# EAGLE board Hera Puissance 2020 ok (EAGLE 7.1.0)
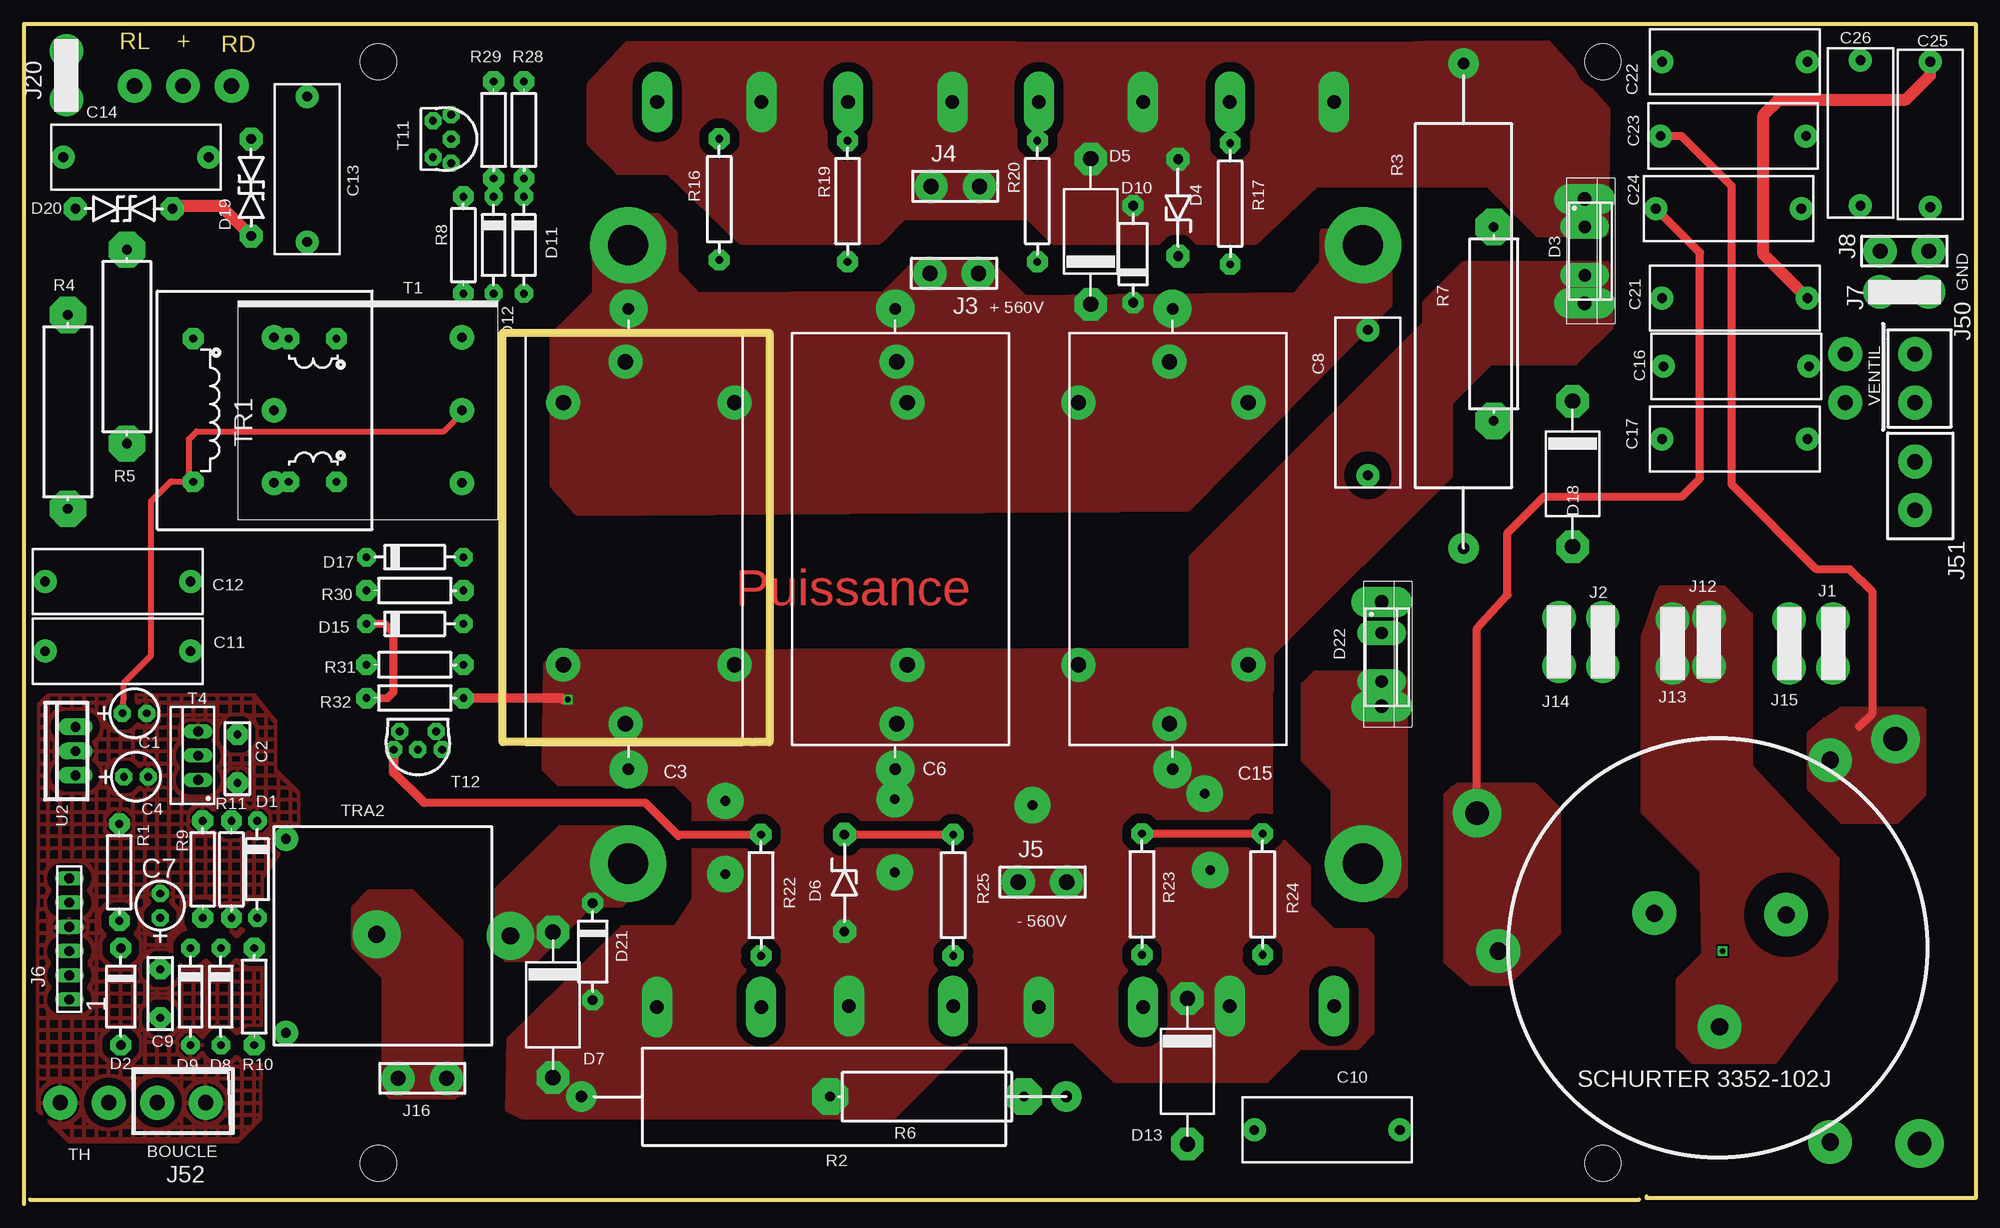
[diagram p0: board, top side]
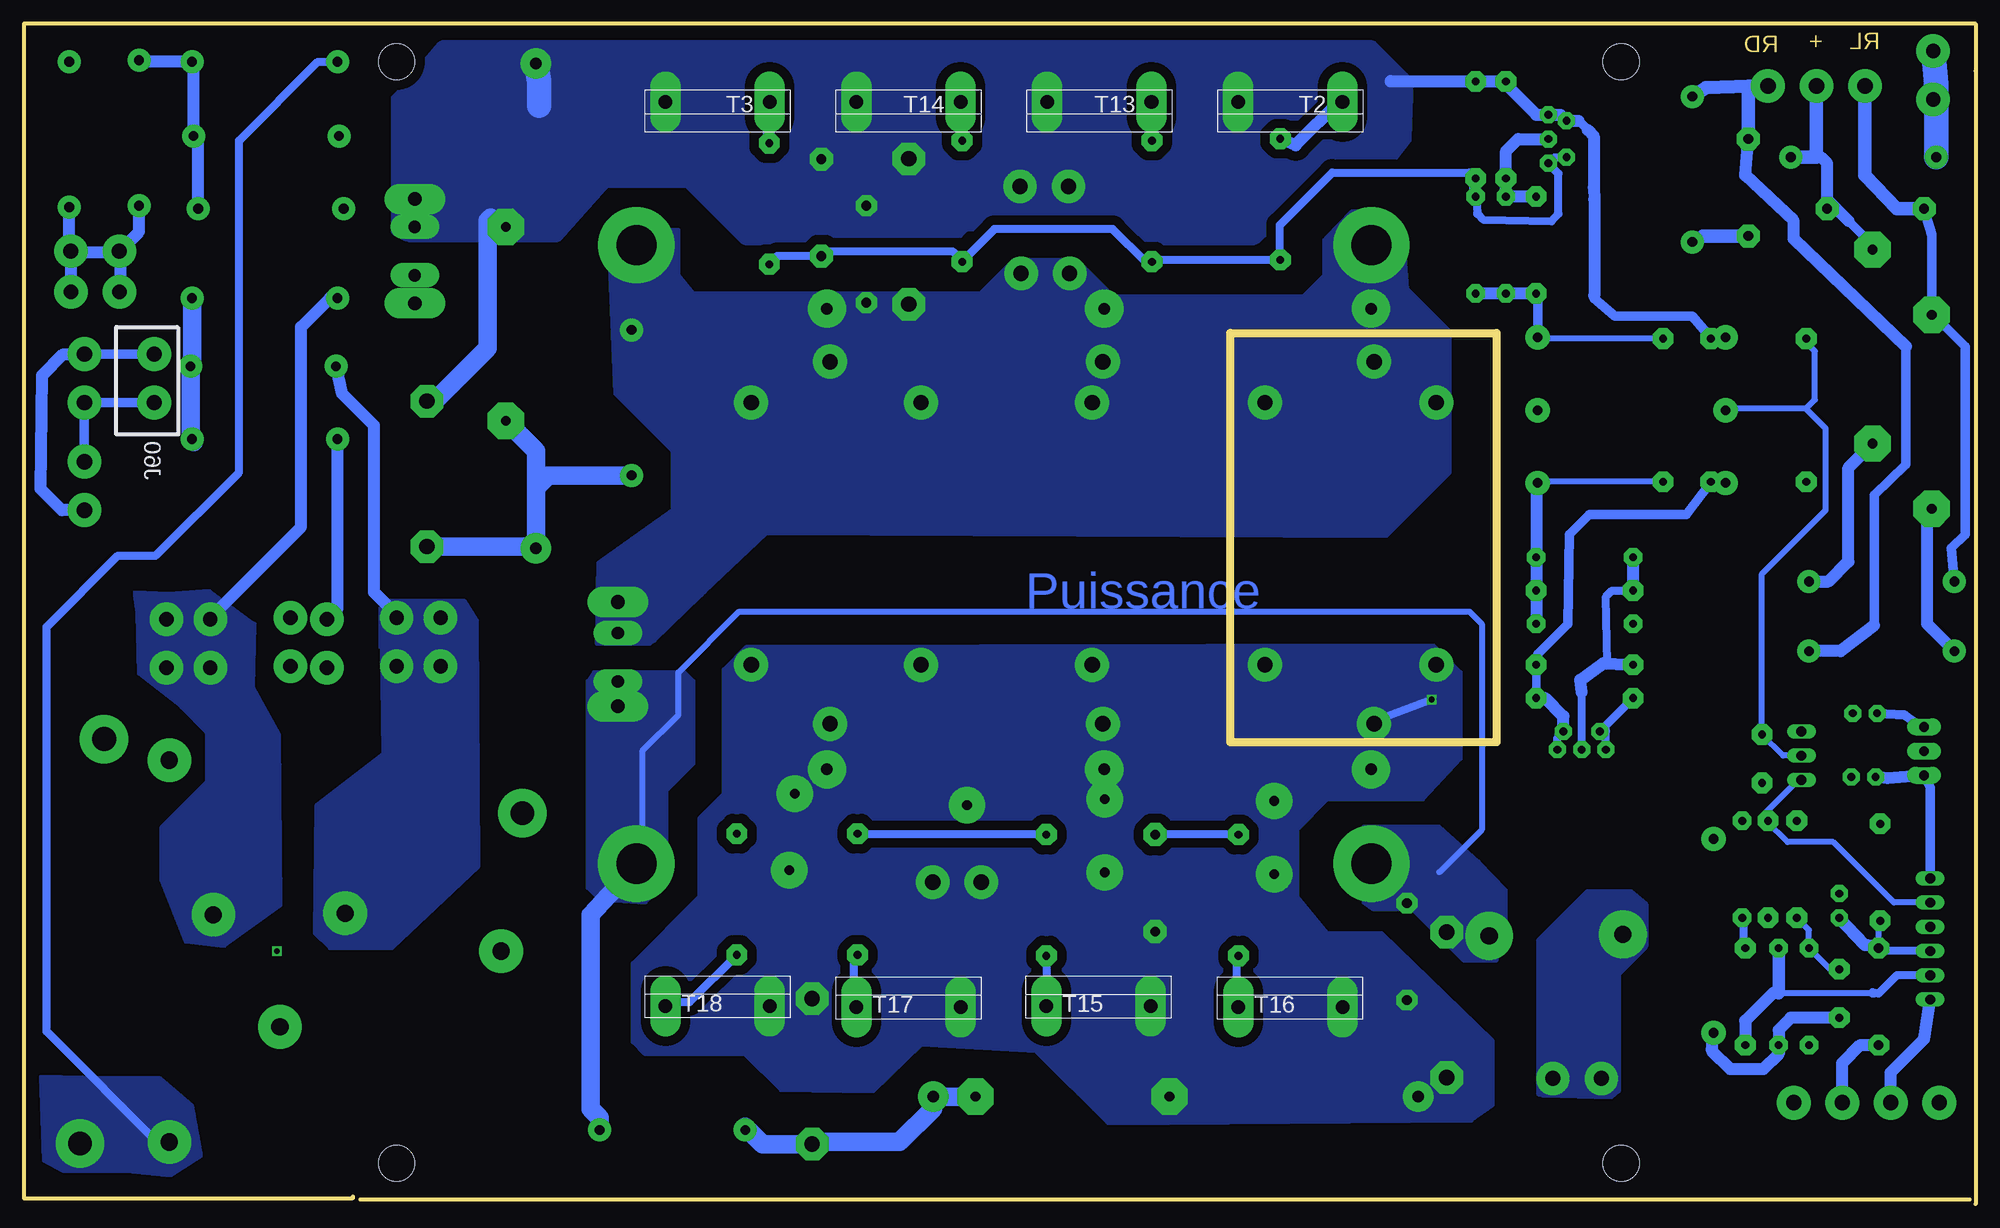
[diagram p1: board, bottom side, seen from below]

Size 204.47 x 123.66 mm. Coordinates in mm from the lower left corner, seen from the top.
Outline: 0,0 0,118.73 0,118.73 0,123.66 204.47,123.66 204.47,0.63 170.02,0.63 170.02,0.79
Outline: 0.63,0.47 169.23,0.47
Copper layers (1*16): Top 0.035mm / dielectric 1.5mm / Bottom 0.035mm
Design rules "default": minimum track width 10mil, minimum drill 24mil, track to track 8mil, track to pad 8mil, pad to pad 8mil, via to via 8mil, smd to smd 8mil, copper to edge 40mil, drill to drill 8mil, minimum pad ring 10mil, minimum via ring 8mil, stop-mask expansion 0mil, vias tented up to drill 0mil, thermal gap 10mil
Holes 3.81 mm at 165.42,119.69 37.15,119.69 37.15,4.28 165.42,4.28
tRestrict: area 180.4,26.1 to 188.8,34.5
Milling: 5 lines

## Footprints (pad centres in the part's own frame; a part is rotated, then mirrored left to right if it is on the bottom)
02P000RA = drill 0.813 pad 1.778 octagon: N 2.54,0; P 0,0
C-5 = drill 0.813 pad 2.159 octagon: 1 5.08,0; 2 0,0
POLY-45 = drill 1.2 pad 4: 1 -24.13,0; 2 24.13,0
C-15 = drill 1.016 pad 2.413: 1 0,0; 2 15.24,0
D-10 = drill 0.813 pad 1.93 octagon: A -5.08,0; K 5.08,0
D-10_1MM = drill 1.016 pad 2.184 octagon: A -5.08,0; K 5.08,0
DOP-3V = drill 1.422 pad 3.175 long: A 5.461,0; K -5.461,0
ZDIO-10 = drill 1.016 pad 2.413 octagon: A -5.08,0; K 5.08,0
D-15 = drill 1.6 pad 3.4 octagon: A -7.62,0; K 7.62,0
TO220DIO = drill 1.27 pad 2.54 long: A 5.08,0; K 0,0
TRANS-10 = drill 1.016 pad 2.413 octagon: A -5.08,0; K 5.08,0
2_TROUS = drill 1.5 pad 3.5: 1 0,0; 2 0,5.08
2_TROUS' = drill 1.6 pad 3.5: 1 0,0; 2 0,5.08
CON06X1 = drill 1.016 pad 1.524 long: 1 0,0; 2 2.54,0; 3 5.08,0; 4 7.62,0; 5 10.16,0; 6 12.7,0
PAST_4,2 = drill 4.2 pad 8: 1 0,0
R-10 = drill 0.813 pad 2.159 octagon: 1 -5.08,0; 2 5.08,0
R-50-5W = drill 1.2 pad 3.2: 1 2.54,0; 2 53.34,0
R-18 = drill 1.016 pad 3.81 octagon: 1 -8.89,0; 2 11.43,0
R-12,5 = drill 0.813 pad 2.184 octagon: 1 -6.35,0; 2 6.35,0
IT_233 = drill 1.016 pad 2.54: P1 -5.08,7.62; P2 14.605,7.62; S1 -5.08,15.24; S2 14.605,15.24; S3 -5.08,0; S4 14.605,0
TOP-3VI = drill 1.422 pad 3.175 long: 1 5.461,0; 3 -5.461,0
TO220V = drill 1.016 pad 1.524 long: 1 0,0; 2 2.54,0; 3 5.08,0
TO92_L = drill 0.813 pad 1.778 octagon: 1 0,0; 2 1.905,1.905; 3 3.81,0; 4 -0.635,1.905; 5 4.445,1.905
TIUTK120 = drill 0.813 pad 2.184 octagon: 1 7.5,7.5; 3 7.5,-7.5; 4 7.5,-2.5; 5 -7.5,-7.5; 6 -7.5,-2.5; 8 -7.5,7.5
TISIRIO1 = drill 1.016 pad 2.54: P1 0,0; P2 20.32,0 | drill 1.8 pad 5: S1 10,9.5; S2 10.16,23.495
TO220V' = drill 1.016 pad 1.778 long: 1 0,0; 2 2.54,0; 3 5.08,0
PAST_1,6 = drill 1.6 pad 3.556: 1 0,0
PAST_1,8 = drill 1.8 pad 4.572: P$1 0,0
PAST_2,5 = drill 2.5 pad 5.08: P$5 0,0

## Placement (x,y rotation side)
C1  22µF  [02P000RA]  10.32,51.43 0 top
C2  1nF  [C-5]  22.38,49.21 270 top
C3  10µF 800V  [POLY-45]  63.34,69.69 270 top
C4  100µF  [02P000RA]  10.48,44.76 0 top
C6  10µF 800V  [POLY-45]  91.28,69.69 270 top
C7  4.7µF  [02P000RA]  14.29,30 90 top
C8  4.7NF1000V  [C-15]  140.81,91.59 270 top
C9  0.1µF  [C-5]  14.29,24.6 270 top
C10  4.7NF1000V  [C-15]  144.14,7.77 180 top
C11  10n-630V  [C-15]  2.22,57.94 0 top
C12  10n-630V  [C-15]  17.46,65.24 180 top
C13  10n-1000v  [C-15]  29.69,100.8 90 top
C14  10nF-1000V  [C-15]  4.13,109.69 0 top
C15  10µF 800V  [POLY-45]  120.33,69.69 270 top
C16  220NF 300V X2  [C-15]  171.77,87.78 0 top
C17  220NF 300V X2  [C-15]  171.61,80.16 0 top
C21  220NF 300V X2  [C-15]  171.61,94.93 0 top
C22  220NF 300V X2  [C-15]  171.61,119.69 0 top
C23  220NF 300V X2  [C-15]  171.45,111.91 0 top
C24  220NF 300V X2  [C-15]  170.97,104.29 0 top
C25  22nF-300V Y2  [C-15]  199.71,104.45 90 top
C26  22nF-300V Y2  [C-15]  192.41,104.61 90 top
D1  1N4148  [D-10]  24.45,35.08 90 top
D2  UF4007  [D-10_1MM]  10.16,21.74 90 top
D3  DSPI 120-12A  [DOP-3V]  163.51,99.85 270 top
D4  18V  [ZDIO-10]  120.92,104.41 270 top
D5  NM  [D-15]  111.76,101.91 270 top
D6  18V  [ZDIO-10]  85.96,33.64 90 top
D7  NM  [D-15]  55.43,20.88 90 top
D8  1N4148  [D-10]  20.64,21.74 90 top
D9  1N4148  [D-10]  17.46,21.74 90 top
D10  NM  [D-10_1MM]  116.21,99.53 270 top
D11  1N4148  [D-10]  52.39,100.48 90 top
D12  1N4148  [D-10]  49.21,100.48 90 top
D13  UF5408  [D-15]  121.89,13.91 90 top
D14  NM  [TO220DIO]  142.24,59.84 270 top
D15  1N4148  [D-10]  40.96,60.8 180 top
D16  NM  [TO220DIO]  163.51,102.39 270 top
D17  1N4148  [D-10]  40.96,67.78 180 top
D18  UF 5408  [D-15]  162.24,76.51 90 top
D19  P6KE300CA  [TRANS-10]  23.81,106.52 270 top
D20  P6KE300CA  [TRANS-10]  10.48,104.29 0 top
D21  NM  [D-10_1MM]  59.59,26.46 90 top
D22  DSPI 120-12A  [DOP-3V]  142.24,57.62 270 top
J1  [2_TROUS]  189.55,56.19 0 top
J2  [2_TROUS]  165.42,56.35 0 top
J3  [2_TROUS']  100,97.53 90 top
J4  [2_TROUS']  95.04,106.64 270 top
J5  [2_TROUS']  104.18,33.74 270 top
J6  CON06-4  [CON06X1]  4.76,21.42 90 top
J7  [2_TROUS]  199.55,95.56 90 top
J8  [2_TROUS']  194.47,99.85 270 top
J12  [2_TROUS]  176.53,56.35 0 top
J13  [2_TROUS]  172.72,56.19 0 top
J14  [2_TROUS]  160.81,56.35 0 top
J15  [2_TROUS]  184.94,56.19 0 top
J16  [2_TROUS']  39.21,13.17 270 top
J20  [2_TROUS]  4.45,115.72 0 top
PAS1  [PAST_4,2]  140.3,100.47 0 top
PAS2  [PAST_4,2]  63.3,100.47 0 top
PAS3  [PAST_4,2]  63.3,35.67 0 top
PAS4  [PAST_4,2]  140.3,35.67 0 top
R1  1K  [R-10]  10,34.76 90 top
R2  NM  [R-50-5W]  55.88,11.27 0 top
R3  NM  [R-50-5W]  150.81,122.07 270 top
R4  22-3w  [R-18]  4.6,81.75 90 top
R5  22-3w  [R-18]  10.79,88.58 90 top
R6  22-3W  [R-18]  93.34,11.27 0 top
R7  22-3W  [R-18]  153.99,93.5 270 top
R8  560  [R-10]  46.04,100.48 270 top
R9  100  [R-10]  18.73,35.08 270 top
R10  10  [R-10]  24.13,21.74 270 top
R11  10K  [R-10]  21.75,35.08 90 top
R16  4.7  [R-12,5]  72.85,105.28 270 top
R17  4.7  [R-12,5]  126.38,104.82 270 top
R19  4.7  [R-12,5]  86.3,105.08 270 top
R20  4.7  [R-12,5]  106.17,105.08 270 top
R22  4.7  [R-12,5]  77.22,32.37 90 top
R23  4.7  [R-12,5]  117.13,32.47 90 top
R24  4.7  [R-12,5]  129.78,32.47 90 top
R25  4.7  [R-12,5]  97.35,32.37 90 top
R28  1k  [R-10]  52.39,112.55 90 top
R29  220  [R-10]  49.21,112.55 90 top
R30  560  [R-10]  40.96,64.29 180 top
R31  220  [R-10]  40.96,56.51 180 top
R32  1k  [R-10]  40.96,53.02 180 top
T1  NM  [IT_233]  31.27,75.56 0 top
T2  3 NGTB 40N120 FL3WG  [TOP-3VI]  71.8,115.47 180 top
T3  [TOP-3VI]  131.8,115.47 180 top
T4  IRF530  [TO220V]  18.26,44.44 90 top
T11  BC327-25  [TO92_L]  42.86,113.5 270 top
T12  BC327-25  [TO92_L]  43.18,49.52 180 top
T13  [TOP-3VI]  91.8,115.47 180 top
T14  [TOP-3VI]  111.8,115.47 180 top
T15  [TOP-3VI]  91.89,20.73 0 top
T16  3 NGTB 40N120 FL3WG  [TOP-3VI]  71.79,20.64 0 top
T17  [TOP-3VI]  111.79,20.65 0 top
T18  [TOP-3VI]  131.79,20.76 0 top
TR1  117120 SIRIO  [TIUTK120]  25.24,83.18 90 top
TRA2  150320 SIRIO  [TISIRIO1]  27.46,38.25 270 top
U2  LM7815  [TO220V']  5.4,44.92 90 top
U$3  [PAST_1,6]  63.02,50.32 0 top
U$4  [PAST_1,6]  91.44,50.32 0 top
U$5  [PAST_1,6]  120.02,50.32 0 top
U$6  [PAST_1,6]  63.02,88.26 0 top
U$7  [PAST_1,6]  91.44,88.26 0 top
U$8  [PAST_1,6]  120.02,88.26 0 top
U$13  [PAST_1,6]  11.59,117.15 0 top
U$16  [PAST_1,6]  16.67,117.15 0 top
U$18  [PAST_1,6]  21.75,117.15 0 top
U$19  [PAST_1,6]  19.05,10.63 0 top
U$20  [PAST_1,6]  8.89,10.63 0 top
U$21  [PAST_1,6]  13.97,10.63 0 top
U$22  [PAST_1,6]  3.81,10.63 0 top
U$23  [PAST_1,6]  190.82,83.97 0 top
U$24  [PAST_1,6]  190.82,89.05 0 top
U$28  [PAST_1,6]  74.45,83.97 90 top
U$29  [PAST_1,6]  92.55,83.97 90 top
U$30  [PAST_1,6]  110.49,83.97 90 top
U$31  [PAST_1,6]  128.27,83.97 90 top
U$32  [PAST_1,6]  92.55,56.51 90 top
U$33  [PAST_1,6]  74.45,56.51 90 top
U$34  [PAST_1,6]  110.49,56.51 90 top
U$35  [PAST_1,6]  128.27,56.51 90 top
U$36  [PAST_1,6]  56.52,83.97 0 top
U$37  [PAST_1,6]  56.52,56.51 0 top
U$38  [PAST_1,6]  198.12,83.97 0 top
U$39  [PAST_1,6]  198.12,89.05 0 top
U$40  [PAST_1,6]  198.12,77.78 0 top
U$41  [PAST_1,6]  198.12,72.7 0 top
U$43  [PAST_1,8]  184.63,30.31 0 top
U$44  [PAST_1,8]  177.64,18.57 0 top
U$45  [PAST_1,8]  189.23,6.5 0 top
U$46  [PAST_1,8]  170.82,30.47 0 top
U$47  [PAST_1,8]  189.23,46.51 0 top
U$48  [PAST_1,8]  154.46,26.5 0 top
U$49  [PAST_2,5]  152.24,40.95 0 top
U$50  [PAST_2,5]  196.06,48.73 0 top
U$51  [PAST_2,5]  198.6,6.34 0 top

## Library data of the parts
C1-C3 C6 C8-C10 C15-C17 C21-C24 D5 D7 D10 D13 D18 D21 R1-R7 = passif
C4 C7 C11-C14 C25 C26 = C
D1 D2 D4 D6 D8 D9 D11 D12 D15 D17 D19 D20 R8-R11 R16 R17 R19 R20 R22-R25 R28-R32 = DISCRETE
D3 D22 = SEMICON
D14 D16 = SEMICON@2
J1 J2 J7 J12-J15 J20 = CONNECT1
J3-J6 J8 J16 = CONNECT
PAS1-PAS4 U$3-U$8 U$13 U$16 U$18-U$24 U$28-U$41 U$43-U$51 = PAST
T1 TR1 = transformateurs
T2 T3 T13-T18 = TRANS
T4 T11 T12 = TRANS1
TRA2 = SPECIAL
U2 = regulate

## Nets
+12V: C1.P T1.P2 TR1.8 U2.3
GND: C1.N C2.1 C4.N C7.N D1.K D9.A J6.4 R1.2 R9.1 R11.1 T4.3 TRA2.P1 U2.2 U$19.1 U$22.1
GNDA: C25.1 C26.1 J7.1 J7.2 J8.1 J8.2
LIMIT: D8.K J6.2 R10.2
N$1: C3.2 C6.2 C15.2 D3.A D6.A D7.A D13.K D16.A D21.A J5.1 J5.2 R2.1 R6.1 R31.1 R32.1 T1.S3 T12.1 T12.4 T15.3 T16.3 T17.3 T18.3 TR1.6 U$3.1 U$4.1 U$5.1 U$32.1 U$33.1 U$34.1 U$35.1 U$37.1
N$2: C4.P J6.6 U2.1
N$3: D1.A R10.1
N$4: D2.A U$21.1
N$5: C7.P D2.K J6.3 R1.1
N$6: J6.1 U$20.1
N$8: C9.2 D9.K R9.2
N$10: C24.1 U$48.P$1 U$49.P$5
N$12: C9.1 D8.A TRA2.P2
N$13: R25.1 T15.1
N$14: C21.1 J1.1 J1.2 J15.1 J15.2 U$43.P$1
N$15: R20.1 T14.1
N$16: C16.2 C17.2 C21.2 C25.2
N$17: C16.1 J2.1 J2.2 J14.1 J14.2 U$46.P$1
N$18: C22.1 U$45.P$1 U$51.P$5
N$19: C22.2 C23.2 C24.2 C26.2
N$20: U$23.1 U$38.1 U$40.1
N$21: C12.2 D20.A R4.2 U$13.1
N$22: C17.1 J12.1 J12.2 J13.1 J13.2 U$44.P$1
N$24: R19.1 T13.1
N$25: R22.1 T16.1
N$26: R24.1 T18.1
N$27: R17.1 T3.1
N$28: R23.1 T17.1
N$29: R16.1 T2.1
N$32: C10.1 D7.K D14.A D21.K D22.A PAS3.1 PAS4.1 TRA2.S2
N$34: C8.2 D18.A R3.2 R7.2
N$35: C2.2 T1.P1 T4.2 TR1.1
N$36: D11.A D12.A R8.2 T1.S2 TR1.3
N$37: D4.K D11.K R16.2 R17.2 R19.2 R20.2 R28.1 T11.3 T11.5
N$40: C23.1 U$47.P$1 U$50.P$5
N$41: C11.2 C13.2 D19.A U$18.1
N$42: C11.1 R4.1
N$43: D12.K R8.1 R29.1 T11.2
N$47: C13.1 C14.2 D19.K D20.K R5.2 U$16.1
N$48: C14.1 J20.1 J20.2
N$49: C3.1 C6.1 C8.1 C15.1 D5.K D10.K D14.K D22.K J3.1 J3.2 PAS1.1 PAS2.1 U$6.1 U$7.1 U$8.1 U$28.1 U$29.1 U$30.1 U$31.1 U$36.1
N$51: D15.A D17.A R30.1 T1.S4 TR1.5
N$52: D6.K D15.K R22.2 R23.2 R24.2 R25.2 R32.2 T12.3 T12.5
N$53: D17.K R30.2 R31.2 T12.2
N$54: C12.1 R5.1
N$56: U$24.1 U$39.1 U$41.1
N$64: C10.2 D13.A R2.2 R6.2
PWM: J6.5 R11.2 T4.1
TRANSF1: D3.K D4.A D5.A D10.A D16.K D18.K J4.1 J4.2 R3.1 R7.1 R28.2 R29.2 T1.S1 T2.3 T3.3 T11.1 T11.4 T13.3 T14.3 TR1.4
TRANSF2: J16.1 J16.2 TRA2.S1

## Tracks (layer width: path | path; a pad name or v marks a point on that pad's centre or on a via)
+12V
  Top 0.61: C1.P 10.48,53.02 10.48,54.6 13.33,57.46 13.33,73.65 15.4,75.72 15.56,75.72 | 15.56,75.72 | 15.56,75.72 15.56,75.68 17.62,75.68 | 17.62,75.68 17.62,75.72 | 17.62,75.68 TR1.8 17.3,74.89 17.3,80.16 18.1,80.96 43.97,80.96 46.04,83.02 T1.P2 | 17.62,75.68 | T1.P2
  Bottom 1.016: U2.3 5.72,50 7.46,51.27 C1.P
GND
  pour Top (isolate 0.8, hatched): 2.54,53.33 24.13,53.33 26.35,50.63 26.35,45.55 28.73,43.17 28.73,39.52 24.92,34.12 24.77,8.88 22.38,6.5 4.76,6.5 1.43,9.84 1.59,52.38
GNDA
  Bottom 1.27: J8.1 194.63,99.69 198.91,99.69 199.39,99.21 199.39,99.69 J8.2 | J8.1 | C26.1 192.41,101.91 J8.1 | C25.1 199.71,100.01 J8.2 | J8.2 199.55,99.69 199.71,99.53 199.55,99.37 J7.1 | J7.2 | J7.2 194.31,95.72 194.31,99.53 194.47,99.69 J8.1
LIMIT
  Bottom 0.61: 10.8,22.06 20.64,22.06
  Bottom 0.813: D8.K 20.32,27.14 | J6.2 8.25,23.96 10.16,22.06 10.64,22.06 10.8,22.22 10.8,22.06
  Bottom 1.27: R10.2 24.13,19.2 21.27,22.06 20.64,22.38 D8.K 20.64,22.06
N$1  (via drill 0.61, 1.02 pad 3.81)
  Top 1.016: v56.99,52.86 56.52,52.86 56.36,53.02 R32.1
  Top 2.54: U$5.1 120.49,50.48
  Bottom 0.61: TR1.6 27.74,75.6 27.78,75.56
  Bottom 0.813: R32.1 R31.1 46.04,53.33 | T12.4 43.81,48.89 T12.1 | U$3.1 63.82,50.32 v56.99,52.86 | 27.9,75.68 27.78,75.56 T1.S3
  Bottom 1.016: 27.78,75.56 30.32,72.22 40.48,72.22 42.55,70.16 42.7,60.8 45.88,57.62 | 45.88,57.62 | R31.1 45.88,57.62
  Bottom 1.27: T12.1 43.18,51.11 45.08,53.02 R32.1
  other vias: 73.48,34.55 91.22,42.43 73.48,42.24 91.22,34.75 124.29,35 105.66,41.81 123.69,42.99
  pour Bottom (isolate 1, no thermals): 50.64,10.31 52.86,8.73 90.8,8.41 98.42,16.03 110.49,16.66 115.57,11.74 125.09,11.9 128.9,15.71 139.38,15.71 140.65,16.98 140.65,25.23 133.67,32.22 133.67,40.48 132.24,41.9 131.13,43.02 131.13,56.03 128.75,58.41 128.11,58.41 56.83,58.57 53.97,55.71 53.97,46.67 57.94,42.38 67.95,42.38 71.12,39.2 71.12,32.22 67.95,28.41 62.23,28.41 50.64,17.14
  pour Top (isolate 1, no thermals): 130.18,12.85 114.3,12.85 110.01,16.98 99.06,16.98 91.12,9.04 52.23,9.04 50.64,9.84 50.8,17.3 62.71,29.04 68.26,29.04 70.17,31.9 70.17,42.06 68.26,43.97 56.04,43.97 54.45,45.55 54.61,56.67 56.2,57.94 129.06,58.1 130.65,56.19 130.65,39.36 134.62,35.39 134.62,31.27 137.16,28.73 140.65,28.73 141.29,28.09 141.29,17.93 139.7,16.34 133.67,16.34
  pour Top (isolate 1.27, no thermals): 165.89,98.58 150.81,98.58 146.69,94.45 146.69,92.23 122.24,67.78 122.24,53.17 122.55,52.86 129.86,52.86 130.81,53.81 130.81,57.62 149.54,76.35 149.54,83.97 153.67,88.1 162.56,88.1 166.37,91.91 166.37,97.94
N$2
  Bottom 1.016: J6.6 4.76,43.65 U2.1
  Bottom 1.27: U2.1 9.21,44.6 C4.P
N$3
  Bottom 0.813: D1.A 24.29,29.84 24.29,27.14
  Bottom 1.27: R10.1 24.29,27.14
N$4
  Bottom 1.27: U$21.1 13.97,14.76 12.06,16.66 D2.A
  Bottom 1.422: 13.97,10.31 U$21.1
N$5
  Bottom 0.61: 10.16,29.68 | 10.16,29.68 R1.1 | D2.K 10.16,29.68
  Bottom 0.813: J6.3 10.48,26.5 D2.K
  Bottom 1.27: D2.K 10.64,26.98 11.59,27.14 C7.P
N$6
  Bottom 1.016: 8.89,13.81 8.89,13.96
  Bottom 1.27: J6.1 5.4,17.3 8.89,13.81 U$20.1
N$8
  Bottom 0.61: R9.2 17.46,28.73 D9.K 15.24,24.6 C9.2
N$10
  Top 0.813: U$49.P$5 152.24,60.32 155.42,63.81 155.42,70.32 159.23,74.13 173.67,74.13 175.58,76.03 175.58,99.69 C24.1 | C24.1 170.81,104.45 | C24.1
  pour Top (isolate 0.014, no thermals): 150.18,43.97 158.27,43.97 160.81,41.43 160.81,28.41 155.42,23.01 151.61,23.01 148.91,25.39 148.91,42.86 149.7,43.65
N$12
  Bottom 0.813: D8.A 20.32,16.98
  Bottom 1.27: TRA2.P2 27.62,16.03 25.72,14.12 22.22,14.12 20.64,15.71 D8.A 20.64,18.25 19.37,19.52 C9.1
N$13
  Bottom 0.813: 97.3,20.68 97.3,20.57 | T15.1 97.3,20.68 | R25.1 97.3,25.96 97.3,20.68
N$14
  Bottom 1.27: C21.1 172.4,94.93 175.42,91.91 175.42,70.95 184.94,61.43 J15.2
  pour Bottom (isolate 0.014, no thermals): 189.23,63.97 185.1,64.29 180.34,60.8 180.5,54.13 177.8,49.21 177.64,31.27 183.51,26.98 187.48,27.46 190.02,33.97 190.02,39.52 185.26,44.28 185.26,49.37 187.96,52.06 192.41,55.56 192.56,61.91 192.88,64.13
N$15
  Bottom 1.27: T14.1 106.34,115.33 106.4,115.27 106.27,115.14 R20.1
N$16
  Top 1.27: C25.2 199.71,118.26 197.17,115.72 183.83,115.72 182.25,114.14 182.25,99.53 C21.2 | C21.2
  Bottom 1.93: C21.2 186.85,87.62 187.01,87.47 C16.2 187.01,80.16 186.85,80 | 186.85,80 186.69,79.84 | C17.2 186.85,80
N$17
  Bottom 1.27: C16.1 171.13,84.92 167.8,81.59 167.8,64.13 165.1,61.43 | 165.1,61.43 | J2.2 165.1,61.43
  pour Bottom (isolate 0.014, no thermals): 167,58.41 166.85,47.14 173.83,41.74 173.99,28.41 172.4,26.82 165.89,26.82 156.85,35.39 157,61.11 158.27,63.18 166.37,63.18 167.16,62.38 167.16,58.73 167.16,58.41
N$18
  Bottom 0.813: C22.1 173.67,119.69 181.93,111.44 181.93,76.67 190.66,67.94 194.63,67.94 202.09,60.48 202.09,18.09 190.02,6.03 U$45.P$1
  pour Bottom (isolate 0.014, no thermals): 190.18,13.17 196.06,13.17 202.72,13.33 202.41,4.6 200.34,3.49 193.68,3.49 189.07,3.01 185.9,5.07 186.85,10.31
N$19
  Bottom 1.27: 186.69,112.23 | 186.69,112.23 C23.2 186.69,119.53 C22.2 | C24.2 186.21,111.75 186.69,112.23 | C22.2 | C22.2 191.77,119.69 191.93,119.53 192.25,119.85 C26.2
N$20
  Bottom 1.016: U$23.1 U$38.1 | U$38.1 | U$38.1 U$40.1
N$21
  Bottom 1.016: D20.A 5.4,104.13 4.6,101.59 R4.2 4.44,93.18 1.11,89.85 1.11,70.16 2.54,68.73 C12.2
  Bottom 1.27: D20.A 6.03,104.29
  Bottom 1.422: 6.03,104.29 8.25,104.29 11.59,107.78 U$13.1
N$22
  Top 0.406: 177.8,18.73 177.96,18.57 U$44.P$1
  Bottom 1.27: J13.2 | C17.1 171.61,62.38 J13.2
  pour Top (isolate 0.014, no thermals): 171.13,63.97 169.55,59.37 169.55,41.11 175.74,34.92 175.89,26.19 173.2,23.49 173.2,16.5 174.78,14.92 183.51,14.92 189.87,23.49 190.02,36.19 180.98,45.87 180.98,61.75 178.12,64.61 171.45,64.61
N$23  (via drill 0.61)
  other vias: 177.96,26.5
N$24
  Bottom 1.27: 86.34,115.61 86.5,115.77 | 86.34,115.61 T13.1 | R19.1 86.3,115.57 86.34,115.61
N$25
  Bottom 0.813: 77.4,20.49 77.4,20.17 | T16.1 77.4,20.49 | R22.1 77.4,25.84 77.4,20.49
N$26
  Bottom 0.813: R24.1 134.73,21.17 136.8,21.17 136.9,21.07 137.4,21.07 137.4,20.91 T18.1
N$27
  Bottom 1.27: T3.1 126.6,115.47 126.38,115.25 R17.1
N$28
  Bottom 0.813: T17.1 117.47,20.87 117.5,20.87 117.5,25.74 R23.1
N$29
  Bottom 1.27: T2.1 66.5,115.47 66.6,115.57 71.24,110.93 R16.1
N$32
  Bottom 0.61: 139.7,35.71 139.7,47.46 135.89,51.27 135.89,55.71 129.54,62.06 53.02,62.06 51.75,60.8 51.75,39.2 56.2,34.76
  Bottom 1.93: C10.1 144.14,9.04 145.1,10 145.1,30.31 141.29,34.44 140.02,35.71 139.7,35.71
  pour Bottom (isolate 0.014, no thermals): 50.16,25.55 50.16,27.46 49.21,28.09 49.21,32.85 52.07,35.87 56.2,39.52 64.14,39.52 64.14,31.58 63.18,30.95 59.05,30.95 53.66,25.55
  pour Top (isolate 0.014, no thermals): 50.16,26.5 49.21,27.14 49.53,28.09 49.53,33.01 56.2,39.52 63.82,39.52 63.82,32.54 62.55,31.27 59.37,31.27 53.66,25.55 50.48,25.55
  pour Bottom (isolate 1.27, no thermals): 135.25,55.71 144.78,55.71 145.42,54.76 145.42,33.17 144.14,31.9 139.38,31.58 136.84,34.12 137.16,34.44 137.16,43.33 134.3,46.19 134.3,54.76
  pour Top (isolate 1.27, no thermals): 135.25,55.71 144.14,55.71 144.78,55.08 144.78,33.17 143.83,32.22 138.43,32.22 137.16,33.49 137.16,43.33 133.99,46.51 133.99,54.45
N$34
  Bottom 1.93: C8.2 149.54,76.35 150.81,75.08 | 150.81,75.08 150.81,69.37 151.13,69.05 R3.2 150.97,68.89 D18.A | 150.81,75.08 150.81,78.89 R7.2
N$35
  Bottom 0.61: T4.2 20.16,46.98 C2.2 22.38,66.03 15.72,72.7 15.72,81.27 17.78,83.34 | 17.78,83.34 16.83,84.29 16.83,89.37 17.9,90.44 17.9,90.52 TR1.1 | 17.78,83.34 26.19,83.34 26.67,82.86 26.51,82.86 T1.P1
N$36
  Bottom 0.61: 45.76,90.68 T1.S2 45.76,90.68 | 45.76,90.68 45.44,90.68 | TR1.3 45.76,90.68
  Bottom 1.016: R8.2 46.23,95.2 | 45.44,90.68 45.88,91.12 T1.S2 45.88,94.77 46.51,95.4
  Bottom 1.27: D11.A D12.A 46.51,95.4 R8.2
N$37
  Bottom 0.813: T11.3 44.13,109.69 T11.5 43.7,107.99 43.7,103.77 44.4,102.97 51.6,103.17 52.2,103.77 52.2,103.87 52.5,107.37 52.48,107.37 R28.1 | R17.2 126.38,98.49 125.54,99.33 D4.K 120.92,99.35 120.5,99.77 107.1,99.77 106.17,98.84 R20.2 106.17,98.74 106.2,98.77 102.8,102.17 90.4,102.17 86.96,98.73 R19.2 86.24,98.13 86.1,98.27 85.96,98.93 R16.2 72.89,98.97 72.9,98.97 72.9,102.57 67.4,108.07 53,108.07 R28.1 52.4,105.58 D11.K
  Bottom 1.27: D11.K R28.1
N$40
  Top 0.813: C23.1 173.67,111.91 178.91,106.67 178.91,75.4 187.8,66.51 191.29,66.51 193.68,64.13 193.68,51.43 192.25,50
  pour Top (isolate 0.014, no thermals): 187.01,49.37 188.6,50.79 190.34,51.91 198.91,51.91 199.07,51.75 199.07,42.86 196.22,40 190.5,40 187.01,43.49
N$41
  Bottom 1.016: 10.64,60.64 10.64,74.29 7.3,77.46 7.3,89.85
  Bottom 1.27: C11.2 14.13,57.94 10.64,60.64 | 7.3,89.85 19.05,101.12 19.05,103.02 24.13,107.78 D19.A
  Bottom 1.422: 23.81,117.15 U$18.1 | D19.A 23.81,117.15 | C13.2 28.26,116.99 23.81,117.15
N$42
  Bottom 1.27: 1.91,57.62 C11.1 5.08,60.8 5.08,72.38 R4.1 | R4.1
N$43
  Bottom 1.27: R8.1 D12.K R29.1 49.21,110.33 47.94,111.59 T11.2
N$47
  Top 1.27: D20.K 15.56,104.61 20.64,104.61 D19.K
  Bottom 1.016: R5.2 10.8,100.48 13.33,103.02
  Bottom 1.27: C14.2 16.19,109.69 15.56,109.05 D20.K 15.56,105.25 13.33,103.02
  Bottom 1.422: 19.53,109.69 C14.2 16.67,109.69 U$16.1 | D19.K 28.58,101.44 C13.1
  Bottom 1.676: C14.2 19.05,109.69
N$48
  Bottom 2.54: C14.1 4.13,117.31 | 4.13,117.31 J20.2 | 4.13,117.31 J20.1
N$49
  pour Bottom (isolate 0.014, no thermals): 70.48,95.08 90.34,95.08 94.15,98.89 100.82,98.89 104.31,95.4 134.3,95.4 135.89,97.31 135.89,102.07 142.88,102.07 143.19,101.12 142.56,84.92 136.52,78.89 136.52,72.7 144.3,67.14 144.46,58.73 138.91,58.73 138.43,59.05 133.51,63.81 133.19,64.13 126.68,70.32 61.75,70 55.09,76.67 55.09,91.43 59.53,95.88 60.01,102.07 61.91,103.97 65.4,103.97 68,101.27 68.3,100.97 68.3,97.27
  pour Top (isolate 0.014, no thermals): 61.91,103.34 66.33,103.34 68,101.67 68.1,97.57 70.58,95.08 90.17,95.19 93.67,98.68 100.99,98.58 104.8,94.77 133.35,95.08 136.21,98.58 136.21,101.75 142.88,101.75 142.88,94.29 121.92,73.02 58.1,72.54 55.56,75.4 55.56,90.96 60.01,95.4 60.01,101.44
N$51
  Bottom 0.61: 45.6,75.68 45.56,75.72 45.52,75.68 TR1.5
  Bottom 1.016: 46.04,75.08 45.56,75.56 T1.S4 45.88,75.4 45.6,75.68
  Bottom 1.27: D15.A R30.1 D17.A 46.04,75.08
N$52
  Top 0.813: D15.K 37.78,60.8 38.73,59.84 38.73,53.65 38.1,53.02 R32.2 | 41.91,42.06 65.09,42.06 68.58,38.57 68.73,38.72 R22.2 | R25.2 97.3,38.72 97.15,38.57 97.01,38.72 D6.K | R24.2 129.61,38.82 129.54,38.89 129.47,38.82 R23.2
  Top 1.016: T12.5 38.73,45.24 41.91,42.06
  Bottom 0.61: 116.68,38.89 116.52,38.89
  Bottom 0.813: T12.5 38.73,49.52 | 38.73,49.52 T12.3 | 38.73,49.52 38.73,50.16 R32.2 | 85.96,38.8 86.04,38.89 | 85.96,38.8 D6.K | R22.2 85.87,38.72 85.96,38.8 | R25.2 116.35,38.72 116.68,38.89 | R23.2 116.75,38.82 116.52,38.89
N$53
  Bottom 0.813: T12.2 41.27,53.65 | R30.2 38.1,64.29 38.73,63.65 38.58,56.67
  Bottom 1.27: R30.2 D17.K | R31.2 38.58,56.67 39.05,56.67 41.43,54.92 41.27,53.65
N$54
  Bottom 1.27: C12.1 15.4,65.24 13.33,67.3 13.33,77.15 R5.1 | R5.1
N$56
  Bottom 1.016: U$39.1 U$24.1
  Bottom 1.27: U$41.1 200.5,72.7 202.72,74.92 202.56,86.83 200.34,89.05 U$39.1 | U$41.1 | U$41.1
N$64
  Bottom 1.93: R6.2 R2.2 | R2.2 109.86,11.27 | R2.2 109.22,10 112.71,6.5 120.97,6.5 121.29,6.18 122.24,6.18 122.13,6.29 D13.A 127.11,6.29 128.9,8.09 C10.2
PWM
  Bottom 0.61: J6.5 8.57,31.58 14.92,37.94 19.69,37.94 21.91,40.16 R11.2 21.59,40.16 21.91,40.48 21.91,41.11 18.57,44.44 T4.1
TRANSF1
  Bottom 0.61: 27.9,90.92 27.94,90.96 28.1,90.8 | 28.1,90.8 | TR1.4 27.94,90.48 27.98,90.52 27.98,90.68
  Bottom 0.813: R28.2 52.39,117.94 | R29.2 49.21,117.31
  Bottom 1.016: 41.59,113.5 40.64,112.55 | 27.98,90.68 28.1,90.8 T1.S1 | 27.9,90.92 29.69,93.02 37.78,93.02 40,94.93 39.97,94.97 39.97,95.2
  Bottom 1.27: R29.2 R28.2 61.26,117.63 61.3,117.67 | 49.21,117.31 46.04,114.14 T11.4 43.5,114.14 T11.1 41.59,113.5 | 40.64,112.55 40,111.91 40,106.52 39.97,105.28 39.97,95.2
  Bottom 1.93: D18.K 161.45,84.13 155.89,89.69 155.89,103.02 155.57,103.34
  Bottom 2.54: R3.1 150.5,117.63 150.5,115.09
  pour Bottom (isolate 1, no thermals): 61.98,108.63 59.68,111.64 59.5,117.57 63.24,121.31 160.63,121.31 165.42,115.72 165.42,102.07 164.15,101.44 148.59,101.44 143.51,107.15 134.94,107.15 128.9,101.12 107.3,101.07 105.8,102.57 92.6,102.57 91.15,101.12 75.56,101.12 68.9,107.47 67.24,108.47
  pour Top (isolate 1, no thermals): 63.43,121.33 144.53,121.23 146.99,121.33 159.53,121.33 165.58,114.61 165.42,101.91 158.75,101.91 153.51,107.15 135.25,107.15 128.9,101.12 107.95,101.12 105.41,103.66 91.95,103.66 89.4,101.12 75.25,101.12 67.63,108.42 62.44,108.42 59.6,111.26 59.6,117.19
TRANSF2
  pour Bottom (isolate 0.014, no thermals): 34.61,31.43 34.61,26.98 37.47,24.12 37.47,11.9 38.26,11.27 45.24,11.42 45.72,11.58 45.72,27.62 40.64,32.7 36.19,32.7
  pour Top (isolate 0.014, no thermals): 36.2,32.7 40.64,32.7 45.72,27.62 45.72,11.58 45.08,11.27 38.42,11.27 37.78,12.22 37.78,23.81 34.61,26.98 34.61,31.11

## Text on the board
Top: Puissance
Bottom: Puissance
Dimension: RL | + | RD
tPlace: SCHURTER 3352-102J
tNames: GND | + 560V | J50 | VENTIL | J51 | - 560V | TH | BOUCLE | J52
bNames: J60